# EAGLE board PSB (EAGLE 7.7.0)
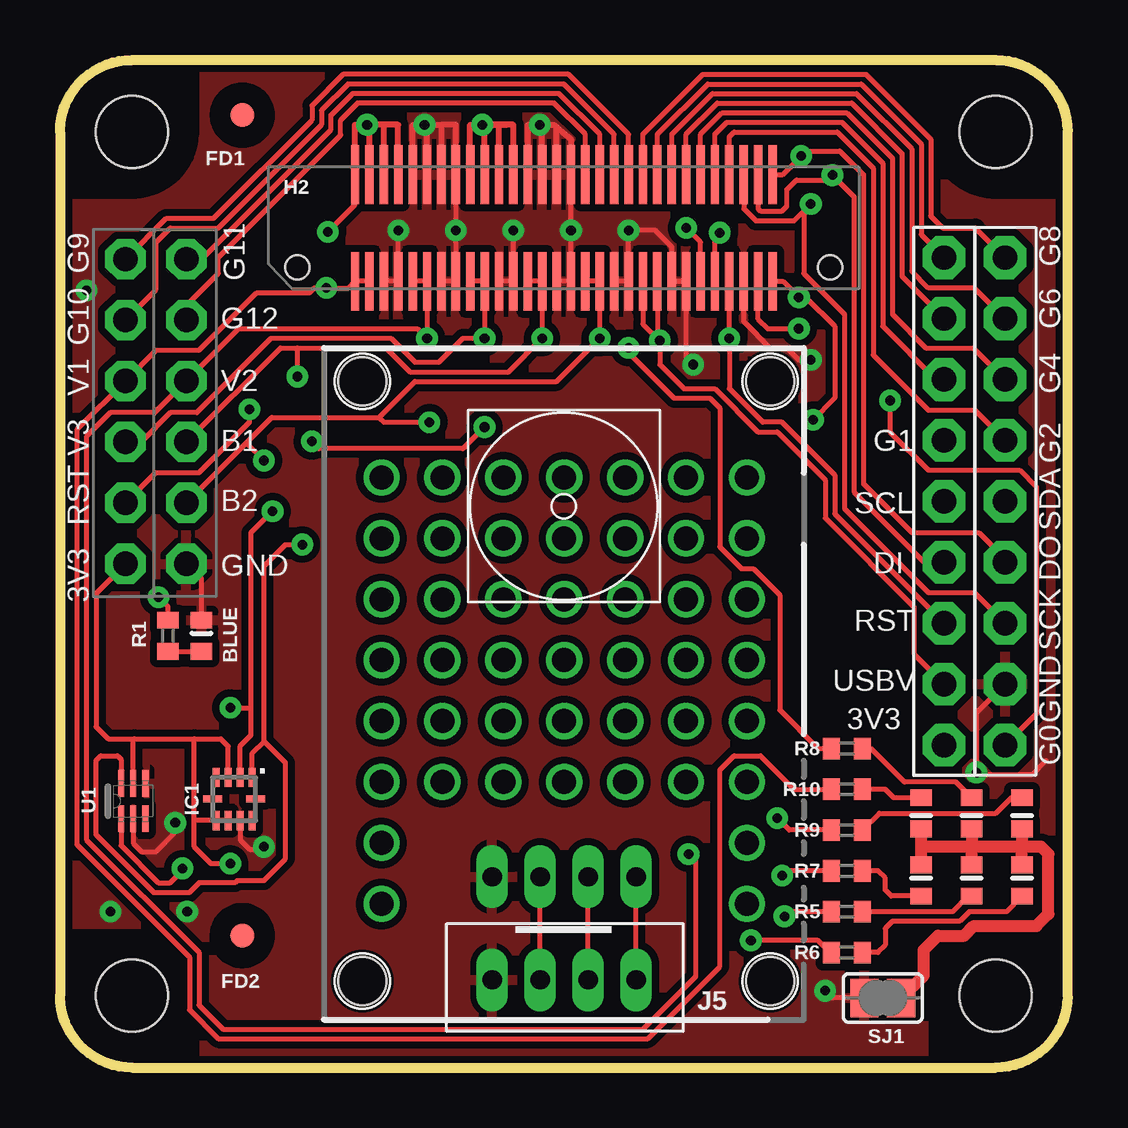
[diagram p0: board, top side]
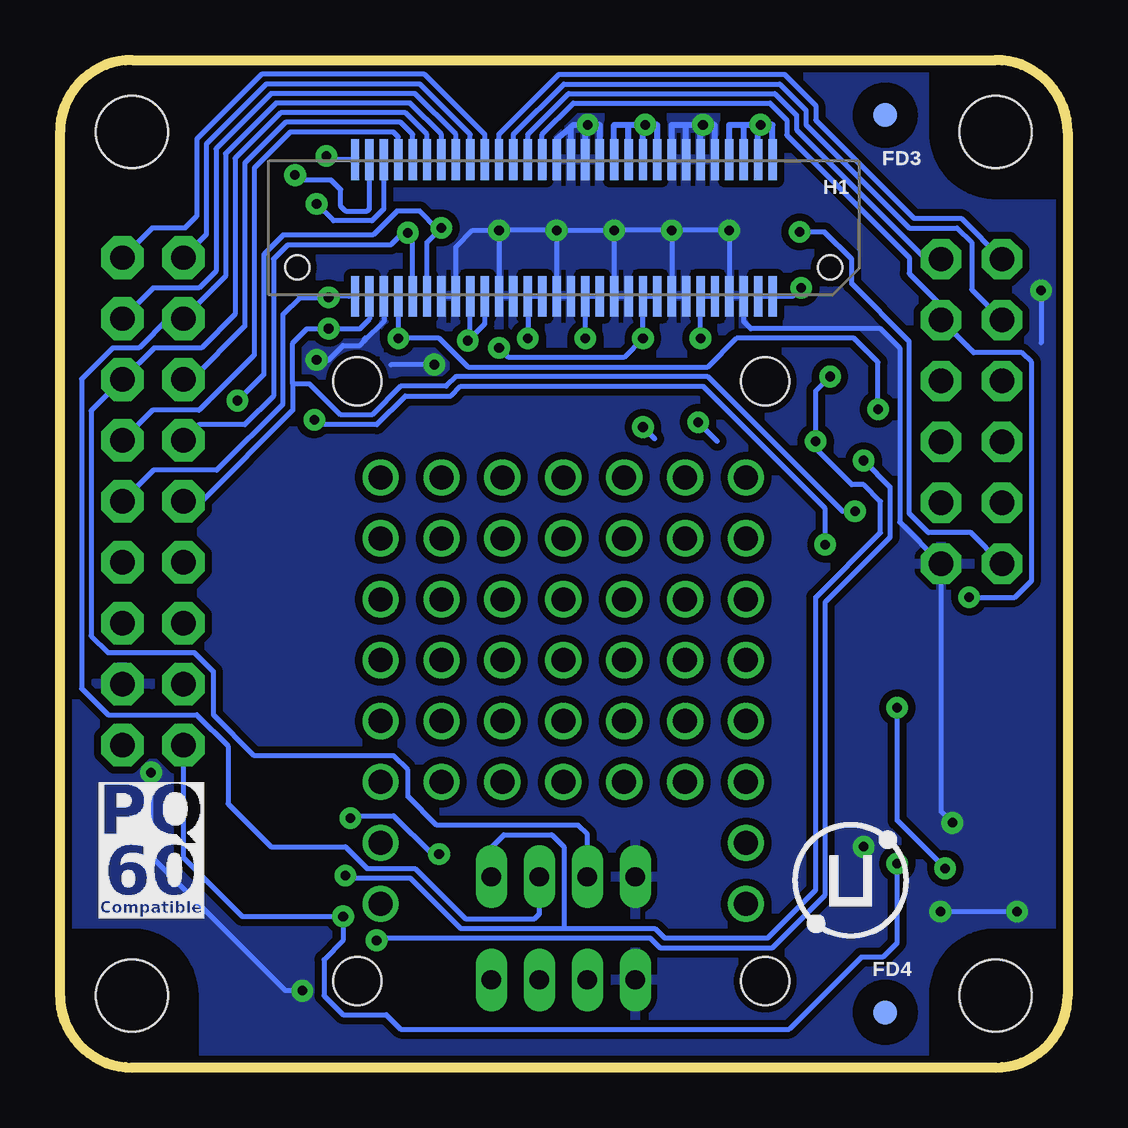
[diagram p1: board, bottom side, seen from below]

Size 42 x 42 mm. Coordinates in mm from the lower left corner, seen from the top.
Outline: 3,0 39,0 arc90 42,3 42,39 arc90 39,42 3,42 arc90 0,39 0,3 arc90 3,0
Copper layers (1*16): Top 0.035mm / dielectric 1.5mm / Bottom 0.035mm
Design rules "pcbtrain *": minimum track width 0.2mm, minimum drill 0.4mm, track to track 0.2mm, track to pad 0.2mm, pad to pad 0.2mm, via to via 0.2mm, smd to smd 0mil, copper to edge 10mil, drill to drill 0.2mm, minimum pad ring 10mil, minimum via ring 10mil, stop-mask expansion 0.125mil, vias tented up to drill 0.4mm, thermal gap 10mil
Holes 2 mm at 12.6,3.6 29.6,3.6 29.6,28.6 12.6,28.6
Holes 3 mm at 3,39 3,3 39,3 39,39
Holes 1 mm at 32.1,33.35 9.9,33.35
tKeepout: area 0,36 to 6,42; area 36,36 to 42,42; area 36,0 to 42,6; area 0,0 to 6,6
bKeepout: area 0,36 to 6,42; area 36,36 to 42,42; area 36,0 to 42,6; area 0,0 to 6,6
Milling: 8 lines

## Footprints (pad centres in the part's own frame; a part is rotated, then mirrored left to right if it is on the bottom)
0402-LED = smd 0.7 x 0.9: A -0.65,0; C 0.65,0
FIDUCIAL_1MM = smd 1 x 1: 1 0,0
FX8C-060S-SV(92) = smd 0.35 x 1.7: P$1 -8.7,2.85; P$2 -8.1,2.85; P$3 -7.5,2.85; P$4 -6.9,2.85; P$5 -6.3,2.85; P$6 -5.7,2.85; P$7 -5.1,2.85; P$8 -4.5,2.85; P$9 -3.9,2.85; P$10 -3.3,2.85; P$11 -2.7,2.85; P$12 -2.1,2.85; P$13 -1.5,2.85; P$14 -0.9,2.85; P$15 -0.3,2.85; P$16 0.3,2.85; P$17 0.9,2.85; P$18 1.5,2.85; P$19 2.1,2.85; P$20 2.7,2.85; P$21 3.3,2.85; P$22 3.9,2.85; P$23 4.5,2.85; P$24 5.1,2.85; P$25 5.7,2.85; P$26 6.3,2.85; P$27 6.9,2.85; P$28 7.5,2.85; P$29 8.1,2.85; P$30 8.7,2.85; P$31 8.7,-2.85; P$32 8.1,-2.85; P$33 7.5,-2.85; P$34 6.9,-2.85; P$35 6.3,-2.85; P$36 5.7,-2.85; P$37 5.1,-2.85; P$38 4.5,-2.85; P$39 3.9,-2.85; P$40 3.3,-2.85; P$41 2.7,-2.85; P$42 2.1,-2.85; P$43 1.5,-2.85; P$44 0.9,-2.85; P$45 0.3,-2.85; P$46 -0.3,-2.85; P$47 -0.9,-2.85; P$48 -1.5,-2.85; P$49 -2.1,-2.85; P$50 -2.7,-2.85; P$51 -3.3,-2.85; P$52 -3.9,-2.85; P$53 -4.5,-2.85; P$54 -5.1,-2.85; P$55 -5.7,-2.85; P$56 -6.3,-2.85; P$57 -6.9,-2.85; P$58 -7.5,-2.85; P$59 -8.1,-2.85; P$60 -8.7,-2.85
FX8C-060P-SV(92) = smd 0.35 x 2.45: P$1 -8.7,-2.225; P$2 -8.1,-2.225; P$3 -7.5,-2.225; P$4 -6.9,-2.225; P$5 -6.3,-2.225; P$6 -5.7,-2.225; P$7 -5.1,-2.225; P$8 -4.5,-2.225; P$9 -3.9,-2.225; P$10 -3.3,-2.225; P$11 -2.7,-2.225; P$12 -2.1,-2.225; P$13 -1.5,-2.225; P$14 -0.9,-2.225; P$15 -0.3,-2.225; P$16 0.3,-2.225; P$17 0.9,-2.225; P$18 1.5,-2.225; P$19 2.1,-2.225; P$20 2.7,-2.225; P$21 3.3,-2.225; P$22 3.9,-2.225; P$23 4.5,-2.225; P$24 5.1,-2.225; P$25 5.7,-2.225; P$26 6.3,-2.225; P$27 6.9,-2.225; P$28 7.5,-2.225; P$29 8.1,-2.225; P$30 8.7,-2.225; P$31 8.7,2.225; P$32 8.1,2.225; P$33 7.5,2.225; P$34 6.9,2.225; P$35 6.3,2.225; P$36 5.7,2.225; P$37 5.1,2.225; P$38 4.5,2.225; P$39 3.9,2.225; P$40 3.3,2.225; P$41 2.7,2.225; P$42 2.1,2.225; P$43 1.5,2.225; P$44 0.9,2.225; P$45 0.3,2.225; P$46 -0.3,2.225; P$47 -0.9,2.225; P$48 -1.5,2.225; P$49 -2.1,2.225; P$50 -2.7,2.225; P$51 -3.3,2.225; P$52 -3.9,2.225; P$53 -4.5,2.225; P$54 -5.1,2.225; P$55 -5.7,2.225; P$56 -6.3,2.225; P$57 -6.9,2.225; P$58 -7.5,2.225; P$59 -8.1,2.225; P$60 -8.7,2.225
QFN-10 = smd 0.8 x 0.3: 1 -0.9,0.75; 2 -0.9,0.25; 3 -0.9,-0.25; 4 -0.9,-0.75; 6 0.9,-0.75; 7 0.9,-0.25; 8 0.9,0.25; 9 0.9,0.75 | smd 0.3 x 0.8: 5 0,-0.9; 10 0,0.9
JST_B4B-PH_HEADER = drill 0.8 long: P1 2.98,0.048; P2 0.98,0.048; P3 -1.02,0.048; P4 -3.02,0.048
2X06-CLEANBIG = drill 1.016 pad 1.676 octagon: 1 -6.35,-1.27; 2 -6.35,1.27; 3 -3.81,-1.27; 4 -3.81,1.27; 5 -1.27,-1.27; 6 -1.27,1.27; 7 1.27,-1.27; 8 1.27,1.27; 9 3.81,-1.27; 10 3.81,1.27; 11 6.35,-1.27; 12 6.35,1.27
1X09-BIG = drill 1.016 pad 1.778 octagon: 1 -10.16,0; 2 -7.62,0; 3 -5.08,0; 4 -2.54,0; 5 0,0; 6 2.54,0; 7 5.08,0; 8 7.62,0; 9 10.16,0
R0402 = smd 0.7 x 0.9: 1 -0.65,0; 2 0.65,0
SJ = smd 1.168 x 1.6: 1 -0.762,0; 2 0.762,0
SOT50P160X60-6N = smd 1.118 x 0.254: 1 -0.737,0.508; 2 -0.737,0; 3 -0.737,-0.508; 4 0.737,-0.508; 5 0.737,0; 6 0.737,0.508

## Placement (x,y rotation side)
BLUE  LED-0402  [0402-LED]  5.9,18 90 top
FD1  FIDUCIAL  [FIDUCIAL_1MM]  7.6,39.7 0 top
FD2  FIDUCIAL  [FIDUCIAL_1MM]  7.6,5.5 0 top
FD3  FIDUCIAL  [FIDUCIAL_1MM]  7.6,39.7 0 bottom
FD4  FIDUCIAL  [FIDUCIAL_1MM]  7.6,2.3 0 bottom
GREEB@2  LED-0402  [0402-LED]  40.1,10.6 270 top
GREEN@1  LED-0402  [0402-LED]  35.9,10.6 270 top
GREEN@3  LED-0402  [0402-LED]  38,10.6 270 top
H1  FX8C-060S-SV(92)  [FX8C-060S-SV(92)]  21,35 180 bottom
H2  FX8C-060P-SV(92)  [FX8C-060P-SV(92)]  21,35 0 top
IC1  SI1146  [QFN-10]  7.26,11.19 270 top
J5  JST-PH_4-PIN_HEADER  [JST_B4B-PH_HEADER]  21,3.7 180 top
J6  JST-PH_4-PIN_HEADER  [JST_B4B-PH_HEADER]  21,8 180 top
JP1  [2X06-CLEANBIG]  4,27.35 270 top
JP2  [1X09-BIG]  39.4,23.6 270 top
JP5  [1X09-BIG]  36.86,23.6 270 top
R1  220R  [R0402]  4.5,18 90 top
R5  220R  [R0402]  32.8,6.5 180 top
R6  330R  [R0402]  32.8,4.8 180 top
R7  330R  [R0402]  32.8,8.2 180 top
R8  220R  [R0402]  32.8,13.3 180 top
R9  220R  [R0402]  32.8,9.9 180 top
R10  220R  [R0402]  32.8,11.6 180 top
RED  LED-0402  [0402-LED]  38,7.8 90 top
SJ1  [SJ]  34.3,2.9 180 top
U1  TMP102AIDRLT  [SOT50P160X60-6N]  3.05,11.11 90 top
U$1  [SA_LOGO_SMALL]  1.7,6.9 0 top
U$2  [UBO_LOGO]  11.5,5.3 0 bottom
U$3  [PQ60_CMP]  40.4,6.2 0 bottom
YELLOW@1  LED-0402  [0402-LED]  35.9,7.8 90 top
YELLOW@2  LED-0402  [0402-LED]  40.1,7.8 90 top

## Library data of the parts
BLUE FD1-FD4 GREEB@2 GREEN@1 GREEN@3 JP1 RED SJ1 U$1 YELLOW@1 YELLOW@2 = ubo_PQ60
H1 H2 = Template
IC1 = silabs
J5 = SRG
J6 = EPS_PQ60
JP2 JP5 = adafruit
R1 R5-R10 = resistor
U1 = Ava; MPN: TMP102AIDRLT; OC_FARNELL: 1652477; OC_NEWARK: 53M3987; PACKAGE: SOT-23-6; SUPPLIER: Texas Instruments
U$2 U$3 = OBC

## Nets
+3V3: H1.P$57 H1.P$58 H1.P$59 H1.P$60 H2.P$57 H2.P$58 H2.P$59 H2.P$60 IC1.3 IC1.6 IC1.7 JP1.11 JP5.9 R5.2 U1.5
+3V3_SW1: H1.P$1 H1.P$2 H2.P$1 H2.P$2 JP1.5 R10.2
+3V3_SW2: H1.P$5 H1.P$6 H2.P$5 H2.P$6 JP1.6 R9.2
+3V3_SW3: H1.P$9 H1.P$10 H2.P$9 H2.P$10 JP1.7 R8.2
BATV: H1.P$49 H1.P$50 H1.P$51 H1.P$52 H2.P$49 H2.P$50 H2.P$51 H2.P$52
BATV_SW1: H1.P$13 H1.P$14 H2.P$13 H2.P$14 J5.P4 J6.P4 JP1.8 R7.2
BATV_SW2: H1.P$17 H1.P$18 H2.P$17 H2.P$18 JP1.10 R6.2
GND: BLUE.C H1.P$3 H1.P$4 H1.P$7 H1.P$8 H1.P$11 H1.P$12 H1.P$15 H1.P$16 H1.P$19 H1.P$20 H1.P$23 H1.P$24 H1.P$28 H1.P$45 H1.P$46 H1.P$47 H1.P$48 H1.P$53 H1.P$54 H1.P$55 H1.P$56 H2.P$3 H2.P$4 H2.P$7 H2.P$8 H2.P$11 H2.P$12 H2.P$15 H2.P$16 H2.P$19 H2.P$20 H2.P$23 H2.P$24 H2.P$28 H2.P$45 H2.P$46 H2.P$47 H2.P$48 H2.P$53 H2.P$54 H2.P$55 H2.P$56 IC1.8 J5.P1 J6.P1 JP1.12 JP2.8 SJ1.2 U1.2 U1.4
GPIO0: H1.P$25 H2.P$25 JP2.9
GPIO1: H1.P$26 H2.P$26 JP5.4
GPIO2: H1.P$34 H2.P$34 JP2.4
GPIO3: H1.P$35 H2.P$35 JP5.3
GPIO4: H1.P$36 H2.P$36 J5.P2 J6.P2 JP2.3
GPIO5: H1.P$37 H2.P$37 J5.P3 J6.P3 JP5.2
GPIO6: H1.P$38 H2.P$38 JP2.2
GPIO7: H1.P$39 H2.P$39 JP5.1
GPIO8: H1.P$40 H2.P$40 JP2.1
GPIO9: H1.P$41 H2.P$41 JP1.1
GPIO10: H1.P$42 H2.P$42 JP1.3
GPIO11: H1.P$43 H2.P$43 JP1.2
GPIO12: H1.P$44 H2.P$44 JP1.4 R1.2
MISO: H1.P$32 H2.P$32 JP5.6
MOSI: H1.P$31 H2.P$31 JP2.6
N$3: BLUE.A R1.1
N$5: GREEN@1.A R10.1
N$6: GREEB@2.A R9.1
N$8: GREEN@3.A R8.1
N$16: R7.1 YELLOW@1.A
N$56: R6.1 YELLOW@2.A
N$57: R5.1 RED.A
N$65: GREEB@2.C GREEN@1.C GREEN@3.C RED.C SJ1.1 YELLOW@1.C YELLOW@2.C
RESET: H1.P$27 H2.P$27 JP1.9 JP5.7
SCK: H1.P$33 H2.P$33 JP2.7
SCL: H1.P$29 H2.P$29 IC1.2 JP5.5 U1.1
SDA: H1.P$30 H2.P$30 IC1.1 JP2.5 U1.6
USB_VBUS: H1.P$21 H1.P$22 H2.P$21 H2.P$22 JP5.8

## Tracks (layer width: path | path; a pad name or v marks a point on that pad's centre or on a via)
+3V3  (via drill 0.4)
  Top 0.2: 12.3,37.49 12.3,38.35 | v11.16,34.83 12.3,35.97 H2.P$60 | R5.2 30.4,6.5 v30.2,6.3 | IC1.3 7.01,13.39 6.7,13.7 5.6,13.7 | U1.5 3.05,13.65 3.1,13.7 | 3.1,13.7 2,13.7 1.5,14.2 1.5,19.77 JP1.11 | 3.1,13.7 5.6,13.7 | 5.6,10.29 5.6,9.2 6.3,8.5 v7.1,8.5 | 5.6,13.7 5.6,10.6 5.6,10.29 | IC1.7 IC1.6 5.6,10.29
  Top 0.254: H2.P$57 14.1,39.3 13.5,39.3 | 13.5,39.3 v12.8,39.3 | H2.P$60 12.3,38.35 12.3,39.3 v12.8,39.3 | H2.P$59 12.9,39.3 v12.8,39.3 | H2.P$58 13.5,39.3
  Bottom 0.2: JP1.11 4.03,22.3 5.8,22.3 6.6,23.1 6.6,30.27 9,32.67 9,33.7 10.13,34.83 v11.16,34.83 | JP5.9 36.86,8.76 34.4,6.3 v30.2,6.3 30.2,5.3 31,4.5 31,3 30.2,2.2 28.4,2.2 27.8,1.6 11.6,1.6 8.6,4.6 7.7,4.6 7.1,5.2 v7.1,8.5
  Bottom 0.254: H1.P$60 12.3,39.3 v12.8,39.3 | H1.P$57 14.1,39.3 13.5,39.3 | 13.5,39.3 v12.8,39.3 | H1.P$58 13.5,39.3 | H1.P$59 12.9,39.3 v12.8,39.3
+3V3_SW1  (via drill 0.4)
  Top 0.2: H2.P$2 H2.P$1 12.03,32.5 v11.1,32.5 10.6,32.5 10.4,32.3 8.2,32.3 5.8,29.9 4.01,29.9 JP1.5 0.7,26.59 0.7,9.3 5.4,4.6 5.4,2.4 6.6,1.2 24.5,1.2 27.5,4.2 27.5,12.4 28.1,13 29.2,13 30.6,11.6 R10.2
  Bottom 0.2: H1.P$2 H1.P$1 11.45,32.15 v11.1,32.5
+3V3_SW2  (via drill 0.4)
  Top 0.2: H2.P$5 H2.P$6 v15.3,30.4 14.9,30.8 7.45,30.8 JP1.6 3.95,27.3 2.1,27.3 1.1,26.3 1.1,9.5 5.8,4.8 5.8,2.6 6.8,1.6 24.3,1.6 26.5,3.8 26.5,8.6 v26.2,8.9 | R9.2 30.4,9.9 v29.9,10.4
  Bottom 0.2: H1.P$5 H1.P$6 v15.3,30.4 | v29.9,10.4 29.8,10.5 28.1,10.5 26.5,8.9 v26.2,8.9
+3V3_SW3  (via drill 0.4)
  Top 0.2: H2.P$9 H2.P$10 v17.7,30.4 16.8,30.4 15.8,29.4 14.8,29.4 13.8,30.4 8.8,30.4 5.7,27.3 4.6,27.3 3.38,26.08 JP1.7 | v23.7,30 23.7,29.8 25.6,27.9 27.1,27.9 27.5,27.5 27.5,21.7 28.4,20.8 28.9,20.8 30,19.7 30,14.9 31.6,13.3 R8.2
  Bottom 0.2: H1.P$9 H1.P$10 v17.7,30.4 18.5,29.6 23.3,29.6 v23.7,30
BATV  (via drill 0.4)
  Top 0.254: v17.6,39.3 18.6,39.3 | H2.P$52 17.1,39.3 v17.6,39.3 | H2.P$49 18.9,39.3 v17.6,39.3 | H2.P$51 17.7,39.3 v17.6,39.3 | H2.P$50 18.3,39.3 v17.6,39.3
  Bottom 0.254: H1.P$52 17.1,39.3 v17.6,39.3 | H1.P$49 18.9,39.3 18.3,39.3 | 18.3,39.3 v17.6,39.3 | H1.P$50 18.3,39.3 | H1.P$51 17.7,39.3 v17.6,39.3
BATV_SW1  (via drill 0.4)
  Top 0.2: H2.P$13 H2.P$14 v20.1,30.4 18.7,29 14.6,29 13.6,30 9.9,30 | JP1.8 9.19,30 9.9,30 | v17.7,26.7 16.8,25.8 10.8,25.8 v10.5,26.1 | v9.9,28.8 9.9,30 | R7.2 30.3,8.2 v30.1,8 | J5.P4 J6.P4
  Bottom 0.2: H1.P$13 H1.P$14 v20.1,30.4 | 17.2,26.2 v17.7,26.7 | v9.9,28.8 10.5,28.2 v10.5,26.1 10.5,25.8 9,24.3 8.5,24.3 7.8,23.6 7.8,22.3 10.5,19.6 10.5,7.4 12.5,5.4 16.8,5.4 17.2,5.8 21,5.8 | 21,5.8 25.3,5.8 27.4,7.9 30,7.9 v30.1,8 | J6.P4 24.02,9.18 23.5,9.7 21.5,9.7 21,9.2 21,5.8
BATV_SW2  (via drill 0.4)
  Top 0.2: H2.P$17 H2.P$18 v22.5,30.4 20.7,28.6 14.8,28.6 13.3,27.1 | JP1.10 7.76,26.04 | 7.76,26.04 8.83,27.1 13.3,27.1 | 13.3,27.1 13.5,26.9 v15.4,26.9 | R6.2 32.2,4.75 32.2,4.7 31.6,5.3 v28.8,5.3 | v8.5,25.3 7.76,26.04
  Bottom 0.2: H1.P$17 H1.P$18 v22.5,30.4 | 14.6,26.1 v15.4,26.9 | v28.8,5.3 28.7,5.4 17.4,5.4 17,5 12.3,5 10.1,7.2 10.1,19.4 7.4,22.1 7.4,24.2 v8.5,25.3
GND  (via drill 0.4)
  Top 0.2: H2.P$23 H2.P$24 | H2.P$19 H2.P$20 v23.7,34.9 24.8,34.9 25.5,34.2 25.5,32.8 25.52,32.77 H2.P$24 | H2.P$15 21.18,32.77 21.2,32.8 21.27,32.8 H2.P$16 v21.3,34.9 H2.P$45 | H2.P$11 H2.P$12 v18.9,34.9 | H2.P$7 H2.P$8 v16.5,34.9 H2.P$53 | H2.P$3 H2.P$4 v14.1,34.9 | H2.P$24 26.1,29.6 v26.4,29.3 | JP2.8 38.2,14.78 v38.2,12.3 38.3,12.2 40.5,12.2 41.1,12.8 | BLUE.C 5.9,20.37 JP1.12 | U1.2 3.05,9.35 3.4,9 4,9 4.8,9.8 v4.8,10.2 | IC1.8 7.51,9.49 7.9,9.1 8.4,9.1 v8.5,9.2 | SJ1.2 32.2,2.9 v31.9,3.2 | H2.P$28 28.5,31.1 29.6,30 30.3,30 30.8,29.5 v31.3,29.5
  Top 0.254: v15.2,39.3 15.9,39.3 | H2.P$56 14.7,39.3 v15.2,39.3 | H2.P$53 16.5,39.3 15.9,39.3 | H2.P$54 15.9,39.3 | H2.P$55 15.3,39.3 v15.2,39.3 | v20,39.3 20.6,39.3 20.7,39.2 | 20.7,39.2 21.3,38.7 H2.P$45 | H2.P$48 19.5,39.3 v20,39.3 | H2.P$47 20.1,39.3 v20,39.3 | H2.P$46 20.7,39.2
  Bottom 0.2: H1.P$24 H1.P$23 25.5,34.2 24.8,34.9 v23.7,34.9 | H1.P$19 H1.P$20 v23.7,34.9 | H1.P$15 H1.P$16 v21.3,34.9 | H1.P$11 H1.P$12 v18.9,34.9 | H1.P$7 H1.P$8 v16.5,34.9 | v21.3,34.9 v23.7,34.9 | v21.3,34.9 v18.9,34.9 | v16.5,34.9 v18.9,34.9 | v16.5,34.9 v14.1,34.9 H1.P$4 H1.P$3 13.5,31.1 13.2,30.8 7.8,30.8 7,30 7,22.73 JP1.12 5.27,10.67 v4.8,10.2 | 28.5,31.4 H1.P$28 28.5,31.1 29.3,30.3 | 29.2,30.4 29.3,30.4 29.3,30.3 | v26.4,29.3 28.2,29.3 | v1.1,32.4 1.1,30.2 | v8.5,9.2 8.5,8.8 8.4,8.7 | v31.9,3.2 32.6,3.2 38.2,8.8 v38.2,12.3 | v31.3,29.5 30.8,29.5 30.2,30.1 29.5,30.1 29.3,30.3 | v2.1,6.5 v5.3,6.5
  Bottom 0.254: H1.P$56 14.7,39.3 v15.2,39.3 | H1.P$53 16.5,39.3 15.9,39.3 | 15.9,39.3 v15.2,39.3 | H1.P$54 15.9,39.3 | H1.P$55 15.3,39.3 v15.2,39.3 | H1.P$48 19.5,39.3 v20,39.3 | H1.P$47 20.1,39.3 v20,39.3 | H1.P$45 21.3,38.7 20.7,39.2 | v20,39.3 20.6,39.3 20.7,39.2 | H1.P$46 20.7,39.2
  pour Top (isolate 0.3): 6,0 36,0 36,3 arc-90 39,6 42,6 42,36 39,36 arc-90 36,39 36,42 6,42 6,39 arc-90 3,36 0,36 0,6 3,6 arc-90 6,3
  pour Bottom (isolate 0.3): 6,0 36,0 36,3 arc-90 39,6 42,6 42,36 39,36 arc-90 36,39 36,42 6,42 6,39 arc-90 3,36 0,36 0,6 3,6 arc-90 6,3
GPIO0  (via drill 0.4)
  Top 0.2: H2.P$25 26.7,34.4 v26.1,35 | v34.6,27.8 34.6,26.5 36.2,24.9 40,24.9 40.7,24.2 40.7,14.74 JP2.9
  Bottom 0.2: H1.P$25 26.7,34.4 v26.1,35 26.3,35 27,35.7 27.95,35.7 28.95,34.7 32.7,34.7 33.5,33.9 33.5,28.9 v34.6,27.8
GPIO1  (via drill 0.4)
  Top 0.2: H2.P$26 27.3,34.6 v27.5,34.8
  Bottom 0.2: H1.P$26 27.3,34.6 v27.5,34.8 27.7,34.8 28.2,34.3 32.5,34.3 33.1,33.7 33.1,28 34.3,26.8 36.2,26.8 JP5.4
GPIO2
  Top 0.2: H2.P$34 27.9,38.8 28.1,39 32.4,39 33.9,37.5 33.9,29.7 36.2,27.4 38.14,27.4 JP2.4
  Bottom 0.2: H1.P$34 27.9,38.8 28.1,39 32.4,39 33.9,37.5 33.9,29.7 36.2,27.4 38.14,27.4 JP2.4
GPIO3
  Top 0.2: H2.P$35 27.3,38.9 27.8,39.4 32.6,39.4 34.3,37.7 34.3,30.9 36.52,28.68 JP5.3
  Bottom 0.2: H1.P$35 27.3,38.9 27.8,39.4 32.6,39.4 34.3,37.7 34.3,30.9 36.52,28.68 JP5.3
GPIO4
  Top 0.2: H2.P$36 26.7,38.9 27.6,39.8 32.8,39.8 34.7,37.9 34.7,31.4 36.1,30 38.08,30 JP2.3 | J5.P2 J6.P2
  Bottom 0.2: H1.P$36 26.7,38.9 27.6,39.8 32.8,39.8 34.7,37.9 34.7,31.4 36.1,30 38.08,30 JP2.3 40.7,27.38 40.7,18 40,17.3 36.4,17.3 35.6,16.5 35.6,14.7 33.9,13 28.1,13 27.5,12.4 27.5,11.3 26.3,10.1 20.4,10.1 20.02,9.72 J6.P2
GPIO5
  Top 0.2: H2.P$37 26.1,38.9 27.4,40.2 33,40.2 35.1,38.1 35.1,32.98 JP5.2 | J5.P3 J6.P3
  Bottom 0.2: H1.P$37 26.1,38.9 27.4,40.2 33,40.2 35.1,38.1 35.1,32.98 JP5.2 37.48,31.22 38.7,30 39.8,30 41.1,28.7 41.1,15.8 40,14.7 36.3,14.7 35,13.4 35,11 33.2,9.2 30.1,9.2 29.2,8.3 27.2,8.3 25.1,6.2 22.22,6.2 22.02,6.4 J6.P3
GPIO6
  Top 0.2: H2.P$38 25.5,38.9 27.2,40.6 33.2,40.6 35.5,38.3 35.5,33.2 36.2,32.5 38.12,32.5 JP2.2
  Bottom 0.2: H1.P$38 25.5,38.9 27.2,40.6 33.2,40.6 35.5,38.3 35.5,33.2 36.2,32.5 38.12,32.5 JP2.2
GPIO7
  Top 0.2: H2.P$39 24.9,38.9 27,41 33.4,41 35.9,38.5 35.9,34.72 JP5.1
  Bottom 0.2: H1.P$39 24.9,38.9 27,41 33.4,41 35.9,38.5 35.9,34.72 JP5.1
GPIO8
  Top 0.2: H2.P$40 24.3,38.9 26.8,41.4 33.6,41.4 36.3,38.7 36.3,35.5 36.8,35 38.16,35 JP2.1
  Bottom 0.2: H1.P$40 24.3,38.9 26.8,41.4 33.6,41.4 36.3,38.7 36.3,35.5 36.8,35 38.16,35 JP2.1
GPIO9
  Top 0.2: H2.P$41 23.7,38.9 21.2,41.4 11.8,41.4 10.5,40.1 10.5,39.5 6.4,35.4 4.43,35.4 JP1.1
  Bottom 0.2: H1.P$41 23.7,38.9 21.2,41.4 11.8,41.4 10.5,40.1 10.5,39.5 6.4,35.4 4.43,35.4 JP1.1
GPIO10
  Top 0.2: H2.P$42 23.1,38.9 21,41 12,41 10.9,39.9 10.9,39.3 6.6,35 4.6,35 4,34.4 4,32.43 JP1.3
  Bottom 0.2: H1.P$42 23.1,38.9 21,41 12,41 10.9,39.9 10.9,39.3 6.6,35 4.6,35 4,34.4 4,32.43 JP1.3
GPIO11
  Top 0.2: H2.P$43 22.5,38.9 20.8,40.6 12.2,40.6 11.3,39.7 11.3,39.1 5.9,33.7 JP1.2
  Bottom 0.2: H1.P$43 22.5,38.9 20.8,40.6 12.2,40.6 11.3,39.7 11.3,39.1 5.9,33.7 JP1.2
GPIO12  (via drill 0.4)
  Top 0.2: H2.P$44 21.9,38.9 20.6,40.2 12.4,40.2 11.7,39.5 11.7,38.87 6.6,33.77 6.6,33.1 5.27,31.77 JP1.4 | R1.2 4.5,19.2 v4.1,19.6
  Bottom 0.2: H1.P$44 21.9,38.9 20.6,40.2 12.4,40.2 11.7,39.5 11.7,38.87 6.6,33.77 6.6,33.1 5.27,31.77 JP1.4 3.91,29.8 1.9,29.8 1.5,29.4 1.5,20.3 2.2,19.6 v4.1,19.6
MISO  (via drill 0.4)
  Top 0.2: H2.P$32 29.1,35.8 29.2,35.7 30.1,35.7 30.3,35.9 30.3,36.6 30.7,37 32,37 v32.2,37.2 33.1,36.3 33.1,24 36.04,21.06 JP5.6
  Bottom 0.2: H1.P$32 29.1,35.8 29.2,35.7 30.1,35.7 30.3,35.9 30.3,36.6 30.7,37 32,37 v32.2,37.2
MOSI  (via drill 0.4)
  Top 0.2: H2.P$31 30.12,37.23 v30.9,38 31.1,38.2 32.5,38.2 33.5,37.2 33.5,24.32 35.52,22.3 38.3,22.3 39.4,21.2 JP2.6
  Bottom 0.2: H1.P$31 30.75,37.85 v30.9,38
N$1  (via drill 1)
  other vias: 18.48,11.9
N$2  (via drill 1)
  other vias: 21.02,11.9
N$3
  Top 0.2: R1.1 BLUE.A
N$5
  Top 0.2: GREEN@1.A 34.75,11.25 34.4,11.6 R10.1
N$6
  Top 0.2: R9.1 34.15,10.6 39,10.6 39.65,11.25 GREEB@2.A
N$7  (via drill 1)
  other vias: 23.56,11.9
N$8
  Top 0.2: GREEN@3.A 37.35,11.9 35.2,11.9 33.8,13.3 R8.1
N$9  (via drill 1)
  other vias: 26.1,11.9
N$10  (via drill 1)
  other vias: 28.64,11.9
N$13  (via drill 1)
  other vias: 15.94,11.9
N$14  (via drill 1)
  other vias: 13.4,11.9
N$16
  Top 0.2: YELLOW@1.A 34.65,7.15 34.4,7.4 34.4,7.9 34.1,8.2 R7.1
N$17  (via drill 1)
  other vias: 13.4,14.44
N$18  (via drill 1)
  other vias: 15.94,14.44
N$19  (via drill 1)
  other vias: 18.48,14.44
N$20  (via drill 1)
  other vias: 21.02,14.44
N$21  (via drill 1)
  other vias: 23.56,14.44
N$22  (via drill 1)
  other vias: 26.1,14.44
N$23  (via drill 1)
  other vias: 28.64,14.44
N$24  (via drill 1)
  other vias: 28.64,16.98
N$25  (via drill 1)
  other vias: 26.1,16.98
N$26  (via drill 1)
  other vias: 23.56,16.98
N$27  (via drill 1)
  other vias: 21.02,16.98
N$28  (via drill 1)
  other vias: 18.48,16.98
N$29  (via drill 1)
  other vias: 15.94,16.98
N$30  (via drill 1)
  other vias: 13.4,16.98
N$31  (via drill 1)
  other vias: 13.4,9.36
N$32  (via drill 1)
  other vias: 13.4,6.82
N$33  (via drill 1)
  other vias: 28.64,9.36
N$34  (via drill 1)
  other vias: 28.64,6.82
N$35  (via drill 1)
  other vias: 28.64,19.52
N$36  (via drill 1)
  other vias: 26.1,19.52
N$37  (via drill 1)
  other vias: 23.56,19.52
N$38  (via drill 1)
  other vias: 18.48,19.52
N$39  (via drill 1)
  other vias: 21.02,19.52
N$40  (via drill 1)
  other vias: 15.94,19.52
N$41  (via drill 1)
  other vias: 13.4,19.52
N$42  (via drill 1)
  other vias: 13.4,22.06
N$43  (via drill 1)
  other vias: 15.94,22.06
N$44  (via drill 1)
  other vias: 18.48,22.06
N$45  (via drill 1)
  other vias: 21.02,22.06
N$46  (via drill 1)
  other vias: 23.56,22.06
N$47  (via drill 1)
  other vias: 26.1,22.06
N$48  (via drill 1)
  other vias: 28.64,22.06
N$49  (via drill 1)
  other vias: 28.64,24.6
N$50  (via drill 1)
  other vias: 26.1,24.6
N$51  (via drill 1)
  other vias: 23.56,24.6
N$52  (via drill 1)
  other vias: 21.02,24.6
N$53  (via drill 1)
  other vias: 18.48,24.6
N$54  (via drill 1)
  other vias: 15.94,24.6
N$55  (via drill 1)
  other vias: 13.4,24.6
N$56
  Top 0.2: YELLOW@2.A 39.45,6.5 37.9,6.5 37.5,6.1 34.7,6.1 34.4,5.8 34.4,5.1 34.1,4.8 R6.1
N$57
  Top 0.2: RED.A 37.85,7.15 37.2,6.5 R5.1
N$58
  Top 0.2: 34.1,2.9 34.5,2.9
N$65
  Top 0.5: SJ1.1 36,3.84 36,4.9 36.6,5.5 37.7,5.5 38.1,5.9 40.7,5.9 41.2,6.4 41.2,8.9 40.9,9.2 40.2,9.2 | 40.2,9.2 38.1,9.2 | 38.1,9.2 35.9,9.2 | 35.9,9.2 GREEN@1.C | YELLOW@1.C 35.9,9.2 | RED.C 38,9.1 38.1,9.2 | GREEN@3.C 38,9.3 38.1,9.2 | YELLOW@2.C 40.1,9.1 40.2,9.2 | GREEB@2.C 40.1,9.3 40.2,9.2
RESET  (via drill 0.4)
  Top 0.2: H2.P$27 v27.9,30.4 27.9,28.3 29.3,26.9 30.1,26.9 32.3,24.7 32.3,23.08 JP5.7 | JP1.9 3.99,24.8 5.8,24.8 7.9,26.9 v7.9,27.44
  Bottom 0.2: H1.P$27 v27.9,30.4 26.2,30.4 25,29.2 15,29.2 13.8,30.4 8.9,30.4 7.9,29.4 v7.9,27.44
SCK  (via drill 0.4)
  Top 0.2: H2.P$33 28.5,35.8 29,35.3 30.6,35.3 v31.3,36 31,35.7 31,33.1 32.7,31.4 32.7,23.3 36.2,19.8 38.12,19.8 JP2.7
  Bottom 0.2: H1.P$33 28.5,35.8 29,35.3 30.6,35.3 v31.3,36
SCL  (via drill 0.4)
  Top 0.2: H2.P$29 29.1,31.2 29.5,30.8 v30.8,30.8 | v8.86,23.19 7.96,22.3 7.96,15 | IC1.2 7.51,13.41 7.96,13.86 7.96,15 | U1.1 2.55,9.25 4.1,7.7 4.6,7.7 5.1,8.2 v5.1,8.3 | v7.1,15 7.96,15
  Bottom 0.2: H1.P$29 29.1,31.2 29.5,30.8 v30.8,30.8 31.7,30.8 32.3,30.2 32.3,28.5 | 32.3,28.5 31.6,28.5 30.3,27.2 29,27.2 27.8,28.4 25.9,28.4 25.5,28.8 15,28.8 9.39,23.19 v8.86,23.19 | 32.3,28.5 32.3,27.4 36.1,23.6 JP5.5 | v7.1,15 7.1,10.3 v5.1,8.3
SDA  (via drill 0.4)
  Top 0.2: v31.4,27 32.3,27.9 32.3,30.9 31.1,32.1 v30.8,32.1 30.12,32.77 H2.P$30 | v10.1,21.8 9.4,21.8 8.5,20.9 8.5,13.6 | IC1.1 8.01,13.11 8.5,13.6 | 8.5,13.6 9.4,12.7 9.4,8.7 8.5,7.8 7.4,7.8 7.3,7.7 5.8,7.7 5.4,7.3 3.9,7.3 1.5,9.7 1.5,12.8 1.7,13 2.4,13 2.55,12.85 U1.6
  Bottom 0.2: 29.95,32.15 H1.P$30 30.75,32.15 v30.8,32.1 32,32.1 32.7,31.4 32.7,27.66 35.46,24.9 38.1,24.9 JP2.5 | v31.4,27 31.2,26.8 28.8,26.8 27.6,28 25.7,28 25.3,28.4 15.2,28.4 10.1,23.3 v10.1,21.8 9.9,21.6
USB_VBUS  (via drill 0.4)
  Top 0.2: H2.P$22 24.9,30.4 v25,30.3 | H2.P$21 24.3,31 v25,30.3 | v25,30.3 25,29.3 26,28.3 27.3,28.3 29.1,26.5 29.9,26.5 31.9,24.5 31.9,22.9 35.6,19.2 35.6,17.24 JP5.8
  Bottom 0.2: H1.P$21 24.3,31 v25,30.3 24.9,30.4 H1.P$22 24.9,32.7

## Text on the board
tPlace: G8 | G9 | G11 | G6 | G12 | G10 | G4 | V1 | V2 | G2 | V3 | B1 | G1 | SDA | RST | B2 | SCL | DO | DI | GND | SCK | 3V3 | RST | GND | USBV | 3V3 | G0
tDocu: Copyright 2019 Satellite Applications Catapult | G7 | G5 | Designed and manufactured in the UK | Payload interface | G3 | LED | Temp | Light | V1 | V3 | V2 | GND | TX | RX | BAT | PWR | PWR | B1 | B2 | buildubo.co.uk
bDocu: PocketQube / PSB | Ver 2.0 / Rev C